# EAGLE board Microcopter (EAGLE 6.5.0)
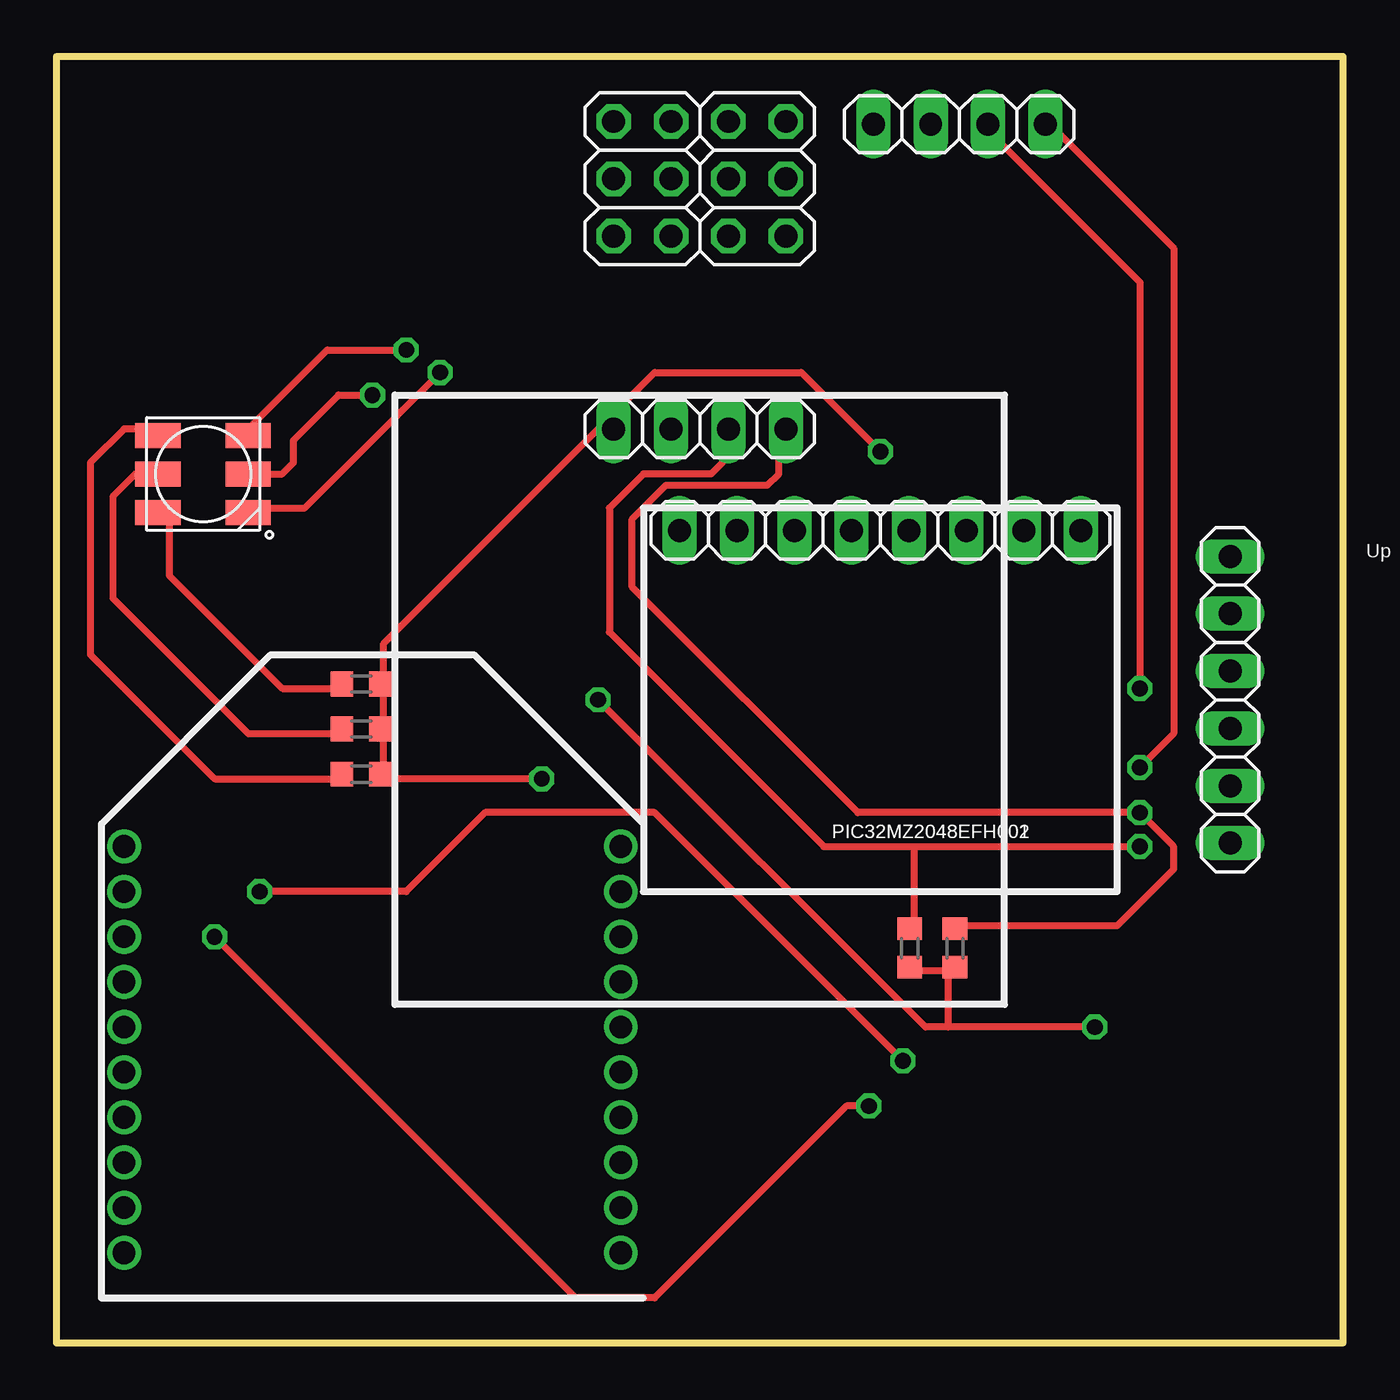
[diagram p0: board, top side]
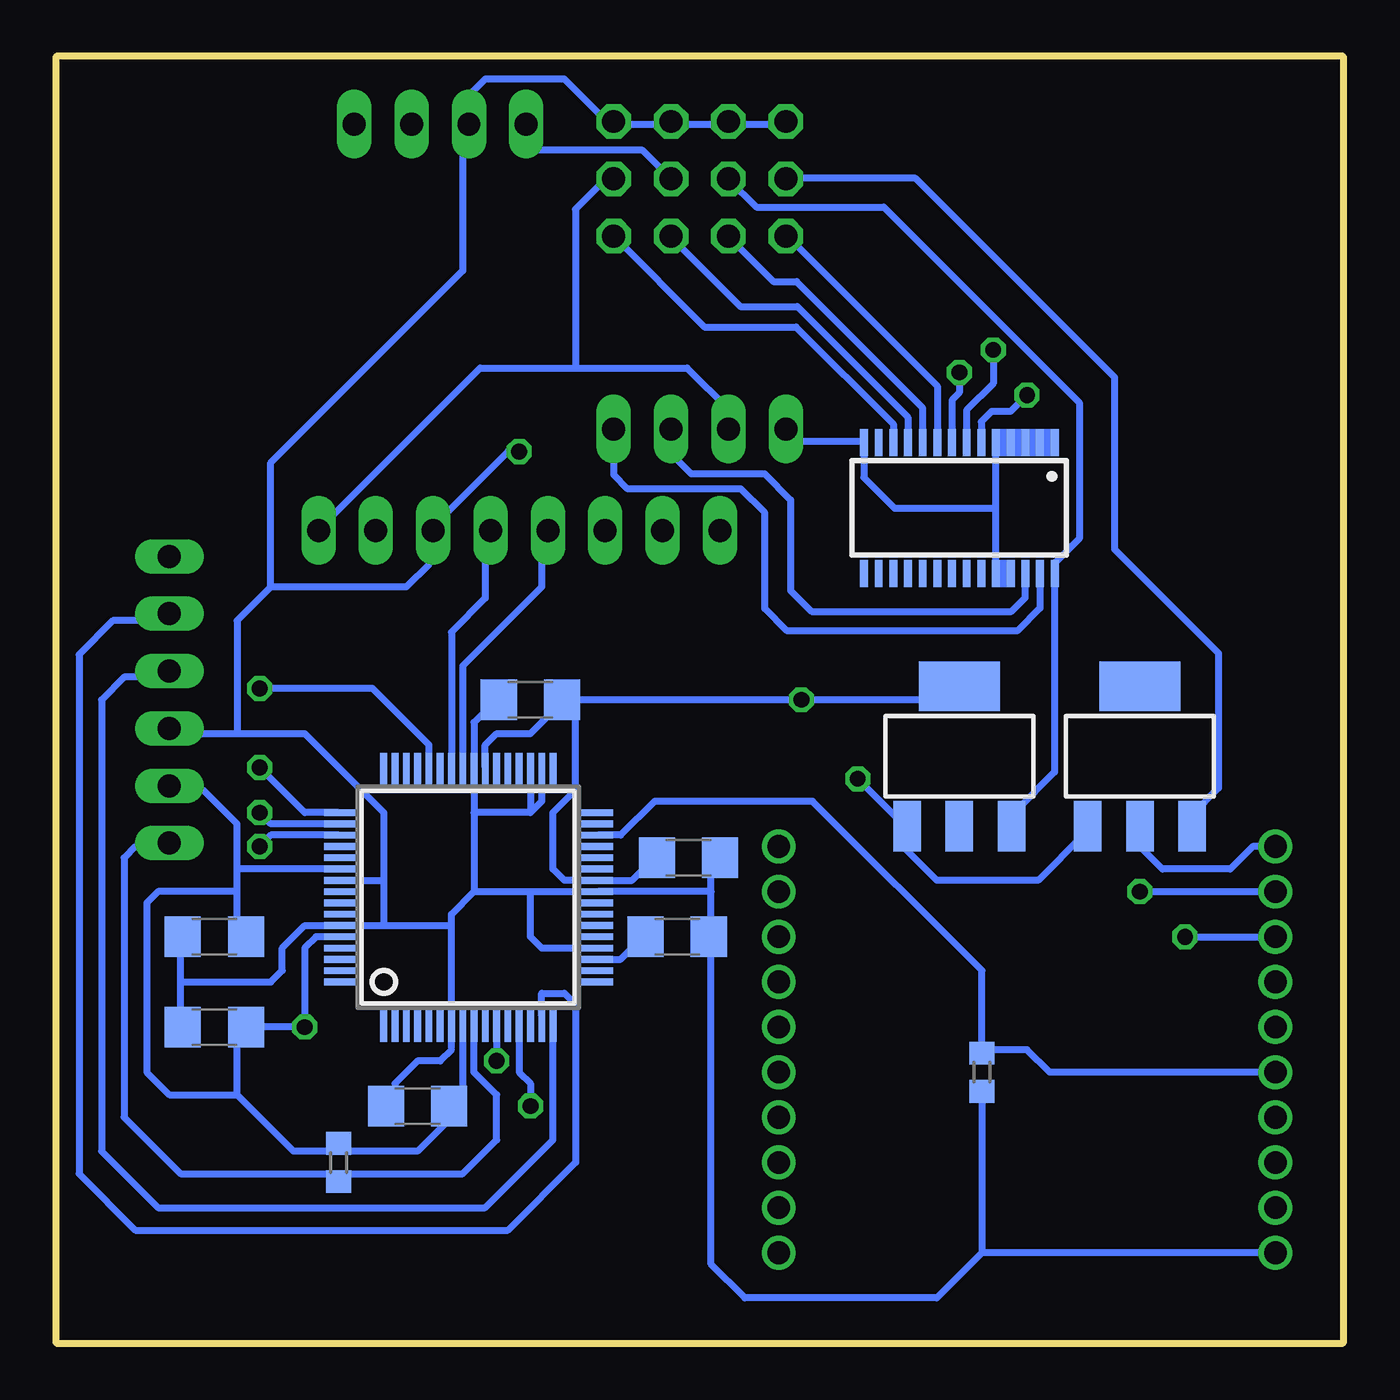
[diagram p1: board, bottom side, seen from below]

Size 57 x 57 mm. Coordinates in mm from the lower left corner, seen from the top.
Outline: 0,57 0,0 57,0 57,57 0,57
Copper layers (1*16): Top 0.035mm / dielectric 1.5mm / Bottom 0.035mm
Design rules "default": minimum track width 10mil, minimum drill 24mil, track to track 8mil, track to pad 8mil, pad to pad 8mil, via to via 8mil, smd to smd 8mil, copper to edge 40mil, drill to drill 8mil, minimum pad ring 10mil, minimum via ring 8mil, stop-mask expansion 4mil, vias tented up to drill 0mil, thermal gap 10mil

## Footprints (pad centres in the part's own frame; a part is rotated, then mirrored left to right if it is on the bottom)
R0603 = smd 1 x 1.1: 1 -0.85,0; 2 0.85,0
1X04 = drill 1.016 long: 1 -3.81,0; 2 -1.27,0; 3 1.27,0; 4 3.81,0
1X08 = drill 1.016 long: 1 -8.89,0; 2 -6.35,0; 3 -3.81,0; 4 -1.27,0; 5 1.27,0; 6 3.81,0; 7 6.35,0; 8 8.89,0
1X06 = drill 1.016 long: 1 -6.35,0; 2 -3.81,0; 3 -1.27,0; 4 1.27,0; 5 3.81,0; 6 6.35,0
2X03 = drill 1.016 octagon: 1 -2.54,-1.27; 2 -2.54,1.27; 3 0,-1.27; 4 0,1.27; 5 2.54,-1.27; 6 2.54,1.27
TSSOP28 = smd 0.35 x 1.2: 1 -4.225,-2.9; 2 -3.575,-2.9; 3 -2.925,-2.9; 4 -2.275,-2.9; 5 -1.625,-2.9; 6 -0.975,-2.9; 7 -0.325,-2.9; 8 0.325,-2.9; 9 0.975,-2.9; 10 1.625,-2.9; 11 2.275,-2.9; 12 2.925,-2.9; 13 3.575,-2.9; 14 4.225,-2.9; 15 4.225,2.9; 16 3.575,2.9; 17 2.925,2.9; 18 2.275,2.9; 19 1.625,2.9; 20 0.975,2.9; 21 0.325,2.9; 22 -0.325,2.9; 23 -0.975,2.9; 24 -1.625,2.9; 25 -2.275,2.9; 26 -2.925,2.9; 27 -3.575,2.9; 28 -4.225,2.9
RGBLED5050 = smd 2 x 1.1: 1 -2,1.7; 2 -2,0; 3 -2,-1.7; 4 2,-1.7; 5 2,0; 6 2,1.7
SOT223 = smd 1.219 x 2.235: 1 -2.311,-3.099; 2 0,-3.099; 3 2.311,-3.099 | smd 3.6 x 2.2: 4 0,3.099
C1206 = smd 1.6 x 1.8: 1 -1.4,0; 2 1.4,0
SQFP-S-10X10-64 = smd 0.3 x 1.6: 1 -3.75,-5.6; 2 -3.25,-5.6; 3 -2.75,-5.6; 4 -2.25,-5.6; 5 -1.75,-5.6; 6 -1.25,-5.6; 7 -0.75,-5.6; 8 -0.25,-5.6; 9 0.25,-5.6; 10 0.75,-5.6; 11 1.25,-5.6; 12 1.75,-5.6; 13 2.25,-5.6; 14 2.75,-5.6; 15 3.25,-5.6; 16 3.75,-5.6; 33 3.75,5.6; 34 3.25,5.6; 35 2.75,5.6; 36 2.25,5.6; 37 1.75,5.6; 38 1.25,5.6; 39 0.75,5.6; 40 0.25,5.6; 41 -0.25,5.6; 42 -0.75,5.6; 43 -1.25,5.6; 44 -1.75,5.6; 45 -2.25,5.6; 46 -2.75,5.6; 47 -3.25,5.6; 48 -3.75,5.6 | smd 1.6 x 0.3: 17 5.6,-3.75; 18 5.6,-3.25; 19 5.6,-2.75; 20 5.6,-2.25; 21 5.6,-1.75; 22 5.6,-1.25; 23 5.6,-0.75; 24 5.6,-0.25; 25 5.6,0.25; 26 5.6,0.75; 27 5.6,1.25; 28 5.6,1.75; 29 5.6,2.25; 30 5.6,2.75; 31 5.6,3.25; 32 5.6,3.75; 49 -5.6,3.75; 50 -5.6,3.25; 51 -5.6,2.75; 52 -5.6,2.25; 53 -5.6,1.75; 54 -5.6,1.25; 55 -5.6,0.75; 56 -5.6,0.25; 57 -5.6,-0.25; 58 -5.6,-0.75; 59 -5.6,-1.25; 60 -5.6,-1.75; 61 -5.6,-2.25; 62 -5.6,-2.75; 63 -5.6,-3.25; 64 -5.6,-3.75

## Placement (x,y rotation side)
E$1  [R0603]  37.8,17.5 90 top
E$2  [R0603]  39.8,17.5 90 top
E$29  [1X04]  28.5,40.5 0 top
E$30  [1X08]  36.5,36 0 top
E$32  [1X06]  52,28.5 90 top
E$33  [2X03]  31.04,51.58 90 top
E$34  [2X03]  25.96,51.58 90 top
E$35  [TSSOP28]  17,37 180 bottom
E$36  [RGBLED5050]  6.5,38.5 0 top
E$37  [SOT223]  17,26 0 bottom
E$38  [C1206]  41,10.5 180 bottom
E$39  [C1206]  29.5,18 0 bottom
E$40  [C1206]  29,21.5 180 bottom
E$41  [C1206]  36,28.5 180 bottom
E$42  [C1206]  50,18 0 bottom
E$43  [C1206]  50,14 0 bottom
E$44  [R0603]  16,12 90 bottom
E$45  [SOT223]  9,26 0 bottom
E$46  [R0603]  13.5,29.2 0 top
E$47  [R0603]  13.5,27.2 0 top
E$48  [R0603]  13.5,25.2 0 top
E$49  [R0603]  44.5,8 270 bottom
E$50  [1X04]  40,54 0 top
PIC32MZ2048EFH001  [SQFP-S-10X10-64]  38.75,19.75 0 bottom
PIC32MZ2048EFH002  [SQFP-S-10X10-64]  38.75,19.75 0 bottom

## Library data of the parts
E$1 E$2 E$37-E$49 PIC32MZ2048EFH001 PIC32MZ2048EFH002 = smd-ipc
E$29 E$30 E$32-E$34 E$50 = pinhead
E$35 = analog-devices
E$36 = adafruit

## Nets
S$118: E$36.5
S$120: E$36.2

## Tracks (layer width: path | path; a pad name or v marks a point on that pad's centre or on a via)
S$1
  Bottom 0.305: 35.5,36 35.5,33.5 39,30 39,25.5
S$2
  Bottom 0.305: 38,36 38,33 39.5,31.5 39.5,25.5
S$3  (via drill 0.7)
  Top 0.305: 29.5,40.5 29.5,39 29,38.5 26,38.5 24.5,37 24.5,31.5 34,22 38,22 | 38,22 v48,22 | 38,18.5 38,22
  Bottom 0.305: 44.5,22.5 47.5,22.5 v48,22
S$4
  Bottom 0.305: 24.77,51.63 18.98,51.63 10.13,42.78 10.13,35.17 5.52,30.56 5.52,24.59 6.71,23.39
S$5
  Bottom 0.305: 12.78,34.09 12.78,25.29 14.49,23.58
S$8  (via drill 0.7)
  Top 0.305: 37.5,16.5 39.5,16.5 | 39.5,16.5 40,16.5 | v46,14 39.5,14 | 39.5,14 38.5,14 24,28.5 | 39.5,16.5 39.5,14
S$9  (via drill 0.7)
  Top 0.305: 40,18.5 47,18.5 49.5,21 49.5,22 v48,23.5 35.5,23.5 25.5,33.5 25.5,36.5 27,38 31.5,38 32,38.5 32,40.5
  Bottom 0.305: 44.5,23 47.5,23 v48,23.5
S$10
  Bottom 0.305: 27.24,51.57 26,50.32 20.35,50.32 11.69,41.67 11.69,35.63 12.75,34.58
S$28  (via drill 1)
  other vias: 25,20
S$31  (via drill 1)
  other vias: 25,22
S$50  (via drill 1)
  other vias: 25,18
S$58  (via drill 1)
  other vias: 25,16
S$60  (via drill 1)
  other vias: 25,14
S$62  (via drill 1)
  other vias: 25,12
S$65  (via drill 1)
  other vias: 25,6
S$67
  Bottom 0.305: 29.72,51.53 31.03,52.84 36.34,52.84
S$71  (via drill 1)
  other vias: 25,8
S$72
  Bottom 0.305: 52,29.5 54,29.5 55,28.5 55,8.5 52.5,6 38,6 35,9 35,14
S$73  (via drill 1)
  other vias: 25,10
S$74  (via drill 1)
  Bottom 0.305: v3,4 16,4 | 28,20 28,21 | 28,20 33,20 | 28,20 28,3.5 26.5,2 18,2 16,4 | 16,11 16,4
S$75  (via drill 1)
  other vias: 3,16
S$76  (via drill 1)
  other vias: 3,14
S$77  (via drill 1)
  other vias: 3,6
S$78  (via drill 1)
  other vias: 3,8
S$79  (via drill 1)
  other vias: 3,10
S$80  (via drill 1)
  other vias: 25,4
S$81  (via drill 1)
  Bottom 0.305: v3,12 13,12 14,13 16,13 16,16.5 23.5,24 30.5,24 32,22.5 33,22.5
S$82
  Bottom 0.305: 39.5,13 40,12.5 41,12.5 42,11.5 42,10
S$83
  Bottom 0.305: 39,14 39,10
S$84
  Bottom 0.305: 38,25.5 38,26.5 37.5,27 36,27 34.5,28.5
S$85
  Bottom 0.305: 33,17 32,17 31,18
S$86  (via drill 1)
  Bottom 0.305: v3,22 4,22 5,21 8,21 9,22
S$87
  Bottom 0.305: 24.69,49.11 17.98,42.4 17.98,39.61
S$88
  Bottom 0.305: 33,20.5 31.5,20.5 30.5,21.5
S$89
  Bottom 0.305: 33.5,20.5 34.5,20.5 35,21 35,23.5 34,24.5 34,28.5 35,28.5
S$90
  Bottom 0.305: 36,25 36,23.5
S$91
  Bottom 0.305: 44.5,21 49,21
S$92
  Bottom 0.305: 15.38,34 15.38,40.05
S$94
  Bottom 0.305: 52,22 53.5,22 54,21.5 54,10 51.5,7.5 39,7.5 37.5,9 37.5,11 38.5,12 38.5,14
S$95  (via drill 0.7, 1)
  Top 0.305: v37.5,12.5 26.5,23.5 19,23.5 15.5,20 v9,20
  Bottom 0.305: 37.5,14 v37.5,12.5 | v9,20 v3,20
S$96
  Bottom 0.305: 35.5,14.5 35.5,15.5 34.5,15.5 34,15 34,8 37,5 53.5,5 56,7.5 56,30.5 54.5,32 52,32
S$97
  Bottom 0.305: 49,18.5 49,20 | 49,20 49,23 50.5,24.5 52,24.5 | 49,20 52.5,20 53,19.5 53,12 52,11 49,11 | 39.5,10 41,8.5 46.5,8.5 49,11 | 44.5,18 45.5,18 46,17.5 46,14 49,14 49,11
S$98  (via drill 0.7)
  Top 0.305: 41,54 48,47 v48,29
  Bottom 0.305: 40.5,25.5 40.5,26.5 43,29 v48,29
S$99
  Bottom 0.305: 21.23,39.86 21.23,38.35 19.87,36.99 15.42,36.99
S$100  (via drill 0.7, 1)
  Top 0.305: v36,10.5 35,10.5 26.5,2 23,2 v7,18
  Bottom 0.305: 36.5,14 36.5,12 36,11.5 v36,10.5 | v7,18 v3,18
S$101
  Bottom 0.305: 24.72,40.4 24.28,39.96 21.24,39.96
S$102
  Bottom 0.305: 27.25,49.04 25.24,47.02 24.21,47.02 18.64,41.45 18.64,39.64
S$103
  Bottom 0.305: 29.82,49.03 26.7,45.92 24.17,45.92 19.28,41.02 19.28,39.76
S$104
  Bottom 0.305: 32.35,49.07 28.3,45.02 24.23,45.02 19.93,40.72 19.93,39.56
S$105
  Bottom 0.305: 32.54,51.7 34.01,50.22 34.01,43.25
S$106
  Bottom 0.305: 13.43,34.09 13.43,32.55 14.43,31.55 24.63,31.55 25.62,32.54 25.62,36.78 26.68,37.84 31.69,37.84 32.3,38.45 32.3,40.5
S$107
  Bottom 0.305: 29.75,40.48 29.75,39.37 28.89,38.51 25.62,38.51 24.47,37.36 24.47,33.34 23.55,32.41 14.69,32.41 14.08,33.02 14.08,34.18
S$108
  Bottom 0.305: 45.47,35.96 38.23,43.2 29.06,43.2 27.21,41.36 27.21,40.53
S$109  (via drill 0.7)
  Top 0.305: 44,54 49.5,48.5 49.5,27 v48,25.5
  Bottom 0.305: 44.5,23.5 46,23.5 v48,25.5
S$113  (via drill 0.7)
  Top 0.305: v36.5,39.5 33,43 26.5,43 14.5,31 14.5,25 v21.5,25
  Bottom 0.305: 11.5,22.5 13.5,20.5 18,20.5 19.5,22 19.5,23 v21.5,25 | v36.5,39.5 37,39.5 40.5,36 40.5,34.5 41.5,33.5 47.5,33.5 | 52,27 49,27 | 49,27 46,27 42.5,23.5 42.5,20.5 | 51.5,14 51.5,16 | 51.5,16 51.5,18 | 51.5,16 47.5,16 47,16.5 47,17.5 46,18.5 42.5,18.5 | 35.5,25.5 35.5,24 36,23.5 38.5,23.5 | 36,20 33.5,20 | 36,20 36,18 35.5,17.5 33,17.5 | 38.5,23.5 38.5,27.5 37.5,28.5 | 38.5,23.5 38.5,20 | 38.5,20 36,20 | 38.5,20 39.5,19 39.5,18.5 | 42.5,18.5 39.5,18.5 | 39.5,13.11 39.5,18.5 | 42.5,20.5 42.5,18.5 | 44.5,20.5 42.5,20.5 | 47.5,33.5 49,32 49,27 | 47.5,33.5 47.5,39 39,47.5 39,55 38,56 34.5,56 32.5,54 25,54
S$114  (via drill 0.7)
  Bottom 0.305: 17,28.5 v24,28.5 34,28.5
S$115  (via drill 0.7)
  Top 0.305: 8.5,40.5 12,44 v15.5,44
  Bottom 0.305: v15.5,44 15.5,42.51 16.68,41.33 16.68,39.75
S$117  (via drill 0.7)
  Top 0.305: 8.5,37 11,37 v17,43
  Bottom 0.305: v17,43 17,42.1 17.33,41.77 17.33,40
S$118  (via drill 0.7)
  Top 0.305: E$36.5 10,38.5 10.5,39 10.5,40 12.5,42 v14,42
  Bottom 0.305: v14,42 14.73,41.27 15.57,41.27 16.03,40.82 16.03,39.9
S$119
  Top 0.305: 4.5,40.5 3,40.5 1.5,39 1.5,30.5 7,25 12.5,25
S$120
  Top 0.305: E$36.2 3.5,38.5 2.5,37.5 2.5,33 8.5,27 13,27
S$121
  Top 0.305: 5,37 5,34 10,29 13,29
(copper drawn outside any net)
  shapes: Bottom area x2

## Text on the board
tNames: Up | Down | Left | Right | Gnd | +5 | Signal